# EAGLE board MRCS-Tiny85-Servo-Auto (EAGLE 7.7.0)
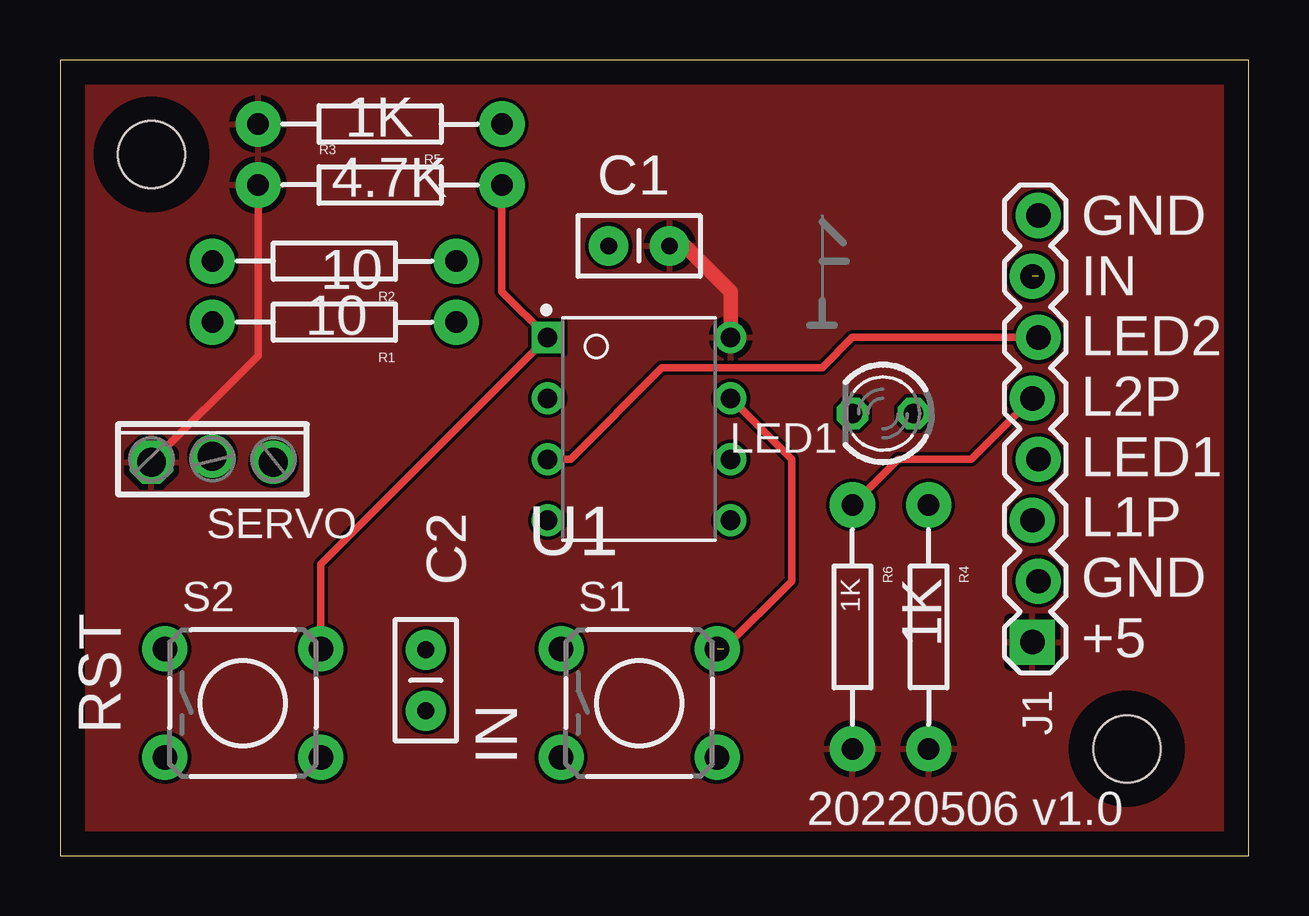
[diagram p0: board, top side]
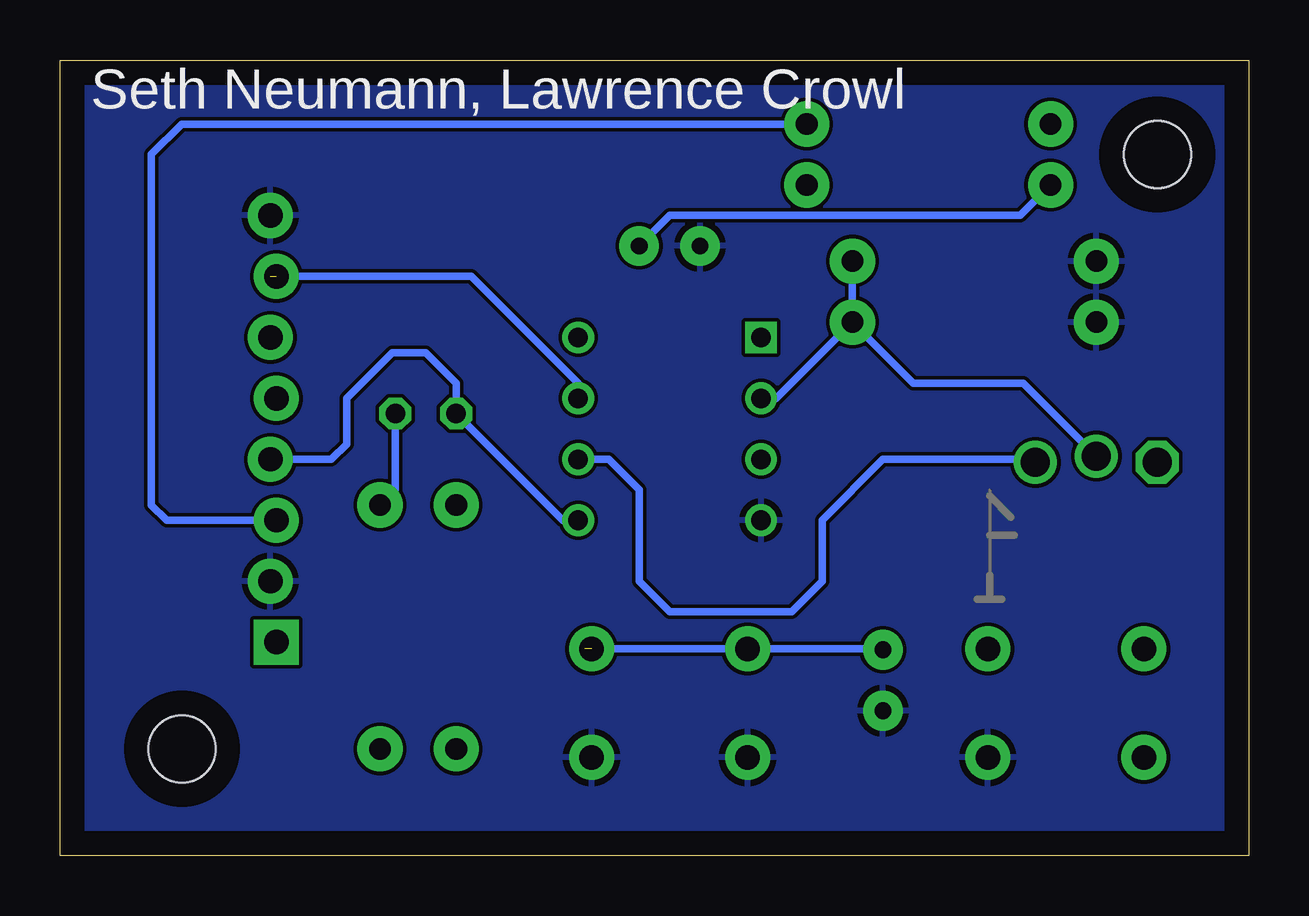
[diagram p1: board, bottom side, seen from below]

Size 49.53 x 33.15 mm. Coordinates in mm from the lower left corner, seen from the top.
Outline: 0,0 49.53,0 49.53,33.15 0,33.15 0,0
Copper layers (1*16): Top 0.035mm / dielectric 1.5mm / Bottom 0.035mm
Design rules "default": minimum track width 6mil, minimum drill 0.35mm, track to track 6mil, track to pad 6mil, pad to pad 6mil, via to via 6mil, smd to smd 6mil, copper to edge 40mil, drill to drill 6mil, minimum pad ring 10mil, minimum via ring 8mil, stop-mask expansion 4mil, vias tented up to drill 0mil, thermal gap 10mil
Holes 2.79 mm at 44.45,4.45 3.81,29.21

## Footprints (pad centres in the part's own frame; a part is rotated, then mirrored left to right if it is on the bottom)
C-PTH-0.100 = drill 0.7 pad 1.651: 1 -1.27,0; 2 1.27,0
1X08_LOCK = drill 1.016 pad 1.88 square: 1 0,0.127 | drill 1.016 pad 1.88: 2 2.54,-0.127; 3 5.08,0.127; 4 7.62,-0.127; 5 10.16,0.127; 6 12.7,-0.127; 7 15.24,0.127; 8 17.78,-0.127
LED3MM = drill 0.813 octagon: A 1.27,0; K -1.27,0
AXIAL-0.4-RES = drill 0.9 pad 1.88: P$1 -5.08,0; P$2 5.08,0
TACTILE-PTH = drill 1.016 pad 1.88: 1 -3.251,2.261; 2 3.251,2.261; 3 -3.251,-2.261; 4 3.251,-2.261
3POL254 = drill 1.2 octagon: 1 -2.54,-0.127 | drill 1.2: 2 0,0.127; 3 2.54,-0.127
DIP762W46P254L927H533Q8B = drill 0.813 square: 1 -3.81,3.81 | drill 0.813: 2 -3.81,1.27; 3 -3.81,-1.27; 4 -3.81,-3.81; 5 3.81,-3.81; 6 3.81,-1.27; 7 3.81,1.27; 8 3.81,3.81

## Placement (x,y rotation side)
C1  0.1uF  [C-PTH-0.100]  24.13,25.4 180 top
C2  0.1 uF  [C-PTH-0.100]  15.24,7.3 270 top
J1  [1X08_LOCK]  40.64,8.89 90 top
LED1  RED  [LED3MM]  34.29,18.41 0 top
R1  10  [AXIAL-0.4-RES]  11.43,22.23 180 top
R2  10  [AXIAL-0.4-RES]  11.43,24.77 180 top
R3  4.7K  [AXIAL-0.4-RES]  13.34,27.94 0 top
R4  1K  [AXIAL-0.4-RES]  36.2,9.53 270 top
R5  1K  [AXIAL-0.4-RES]  13.34,30.48 180 top
R6  1K  [AXIAL-0.4-RES]  33.02,9.53 270 top
S1  [TACTILE-PTH]  24.13,6.35 0 top
S2  [TACTILE-PTH]  7.62,6.35 0 top
SERVO  CONNECTOR-M03254-LOCK  [3POL254]  6.35,16.51 0 top
U1  ATTINY85-20PU  [DIP762W46P254L927H533Q8B]  24.13,17.78 0 top
U$1  [MRCSLOGOTOP]  30.48,21.59 0 top
U$2  [CA-PROP65WARNING]  29.84,7.62 0 top
U$3  [MRCSLOGOBTM]  4.45,10.16 0 top

## Library data of the parts
C1 C2 J1 LED1 R1-R6 SERVO = SPCoast
S1 S2 = SparkFun-Electromechanical
U1 = ATTINY85-20PU; AVAILABILITY: In Stock; DESCRIPTION: AVR AVR® ATtiny, Functional Safety (FuSa) Microcontroller IC 8-Bit 20MHz 8KB (4K x 16) FLASH 8-PDIP; MF: Microchip Technology / Atmel; MP: ATTINY85-20PU; PACKAGE: None; PRICE: None; PURCHASE-URL: https://pricing.snapeda.com/search/part/ATTINY85-20PU/?ref=eda
U$1 = MRCSLogoTop
U$2 = MRCS-prop65warningBtm
U$3 = MRCSLogoBtm

## Nets
+5V: C1.1 J1.1 R3.P$1 R4.P$2 R5.P$2 R6.P$2 SERVO.1 U1.8
ADC3: R1.P$1 R2.P$1 SERVO.2 U1.2
GND: C1.2 C2.2 J1.2 J1.8 R1.P$2 R2.P$2 S1.3 S1.4 S2.4 U1.4
INPUT: C2.1 J1.7 S1.1 S1.2 U1.7
LED1: J1.4 LED1.K U1.5
LED1PWR: J1.3 R5.P$1
LED2PWR: J1.5 R6.P$1
N$2: LED1.A R4.P$1
N$3: R3.P$2 S2.2 U1.1
N$4: J1.6 U1.3
SERVO: SERVO.3 U1.6

## Tracks (layer width: path | path; a pad name or v marks a point on that pad's centre or on a via)
+5V
  Top 0.305: R3.P$1 8.26,20.83 SERVO.1
  Top 0.61: U1.8 27.94,23.5 26.04,25.4 C1.1
  Bottom 0.305: R3.P$1 9.53,26.67 24.13,26.67 C1.1
  pour Top: 0,0 49.53,0 49.53,33.02 0,33.02
ADC3
  Bottom 0.305: U1.2 19.68,19.05 R1.P$1 | R2.P$1 R1.P$1 | SERVO.2 9.4,19.68 13.97,19.68 R1.P$1
GND
  pour Bottom: 0,0 49.53,0 49.53,33.02 0,33.02
INPUT  (2 unrouted)
  Top 0.305: U1.7 30.48,16.51 30.48,11.43 27.66,8.61
  Bottom 0.305: U1.7 27.94,19.68 32.38,24.13 40.77,24.13 | C2.1 15.32,8.61 S1.1 S1.2
LED1
  Bottom 0.305: J1.4 38.23,16.51 37.59,17.14 37.59,19.05 35.69,20.95 34.29,20.95 33.02,19.68 LED1.K 28.57,13.97 U1.5
LED1PWR
  Bottom 0.305: R5.P$1 44.45,30.48 45.72,29.21 45.72,14.61 45.09,13.97 J1.3
LED2PWR
  Top 0.305: R6.P$1 34.92,16.51 37.97,16.51 J1.5
N$2
  Bottom 0.305: LED1.A 35.56,15.24 R4.P$1
N$3
  Top 0.305: R3.P$2 18.41,23.5 U1.1 10.87,12.14 S2.2
N$4
  Top 0.305: U1.3 21.27,16.51 25.08,20.32 31.75,20.32 33.02,21.59 J1.6
SERVO
  Bottom 0.305: SERVO.3 9.02,16.51 15.24,16.51 17.78,13.97 17.78,11.43 19.05,10.16 24.13,10.16 25.4,11.43 25.4,15.24 26.67,16.51 U1.6

## Text on the board
tPlace: GND / IN / LED2 / L2P / LED1 / L1P / GND / +5 | RST | IN | 20220506 v1.0
bPlace: Seth Neumann, Lawrence Crowl
tDocu: ATTiny85 Auto Servo